# EAGLE board M-Brain (EAGLE 7.6.0)
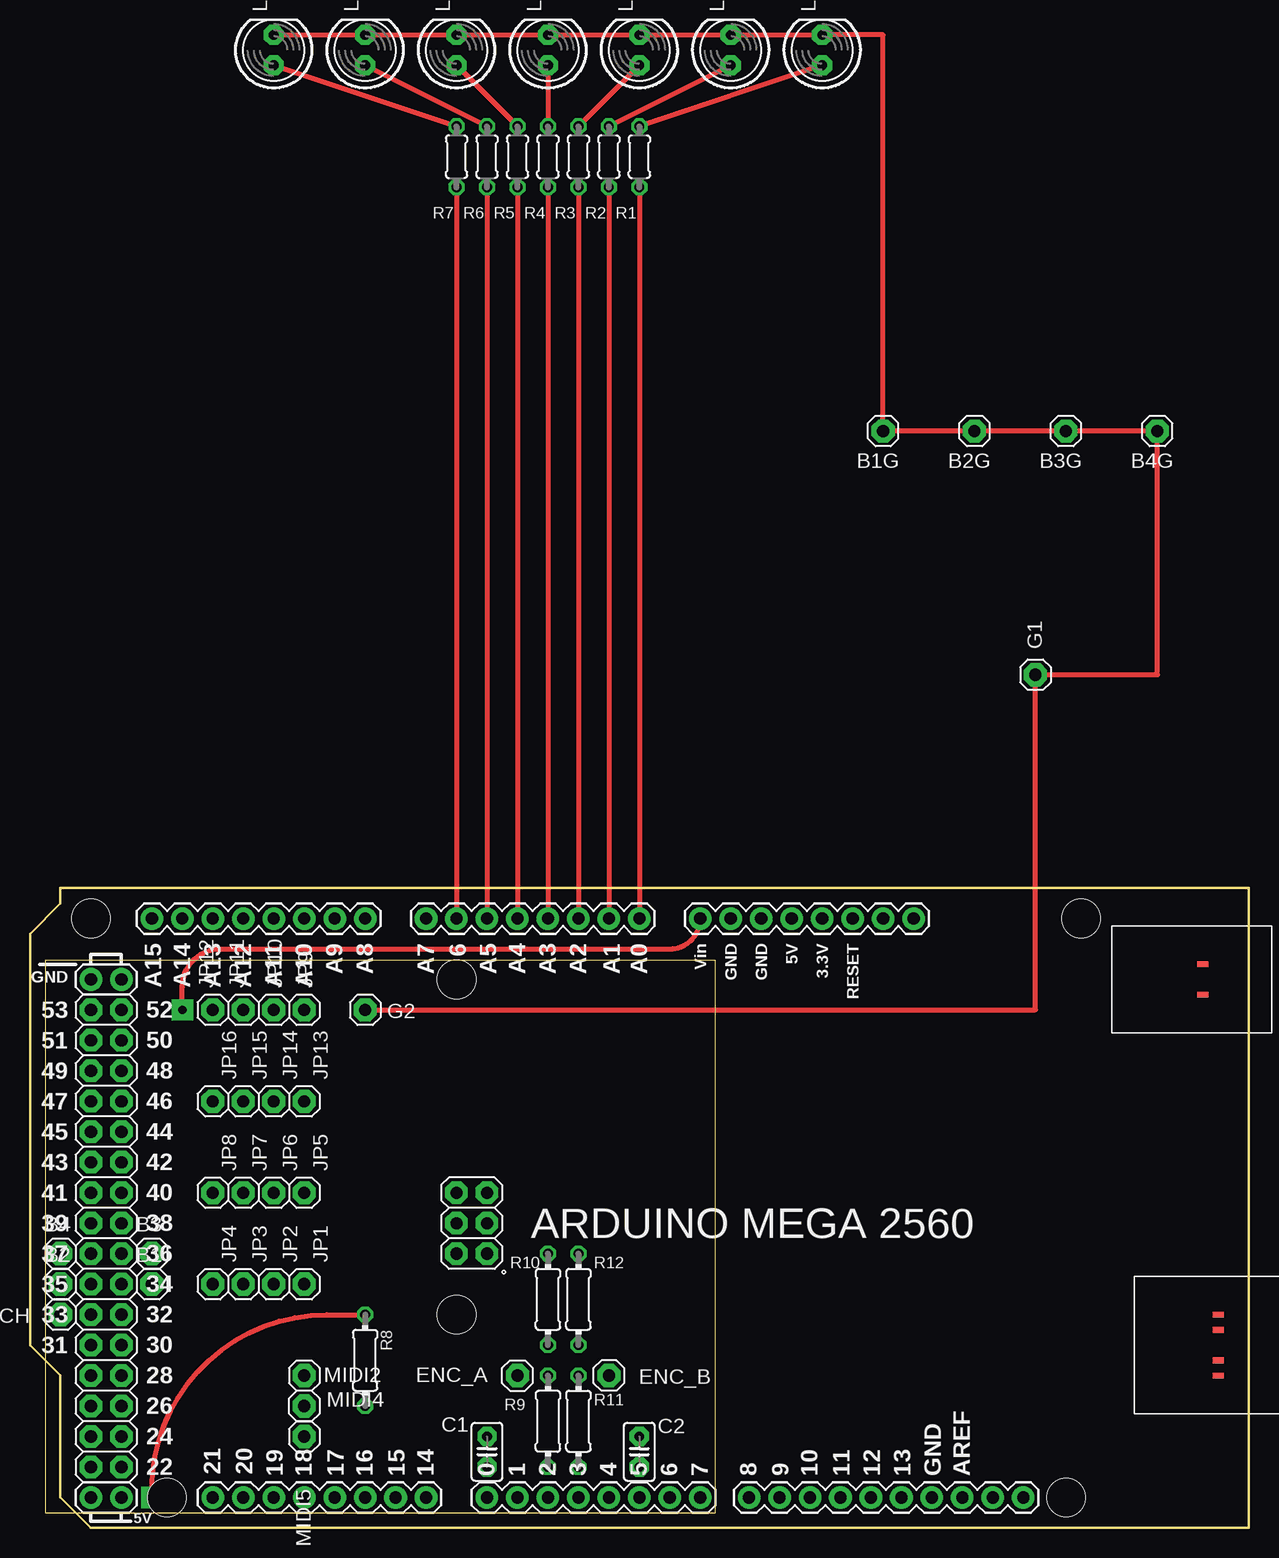
[diagram p0: board, top side]
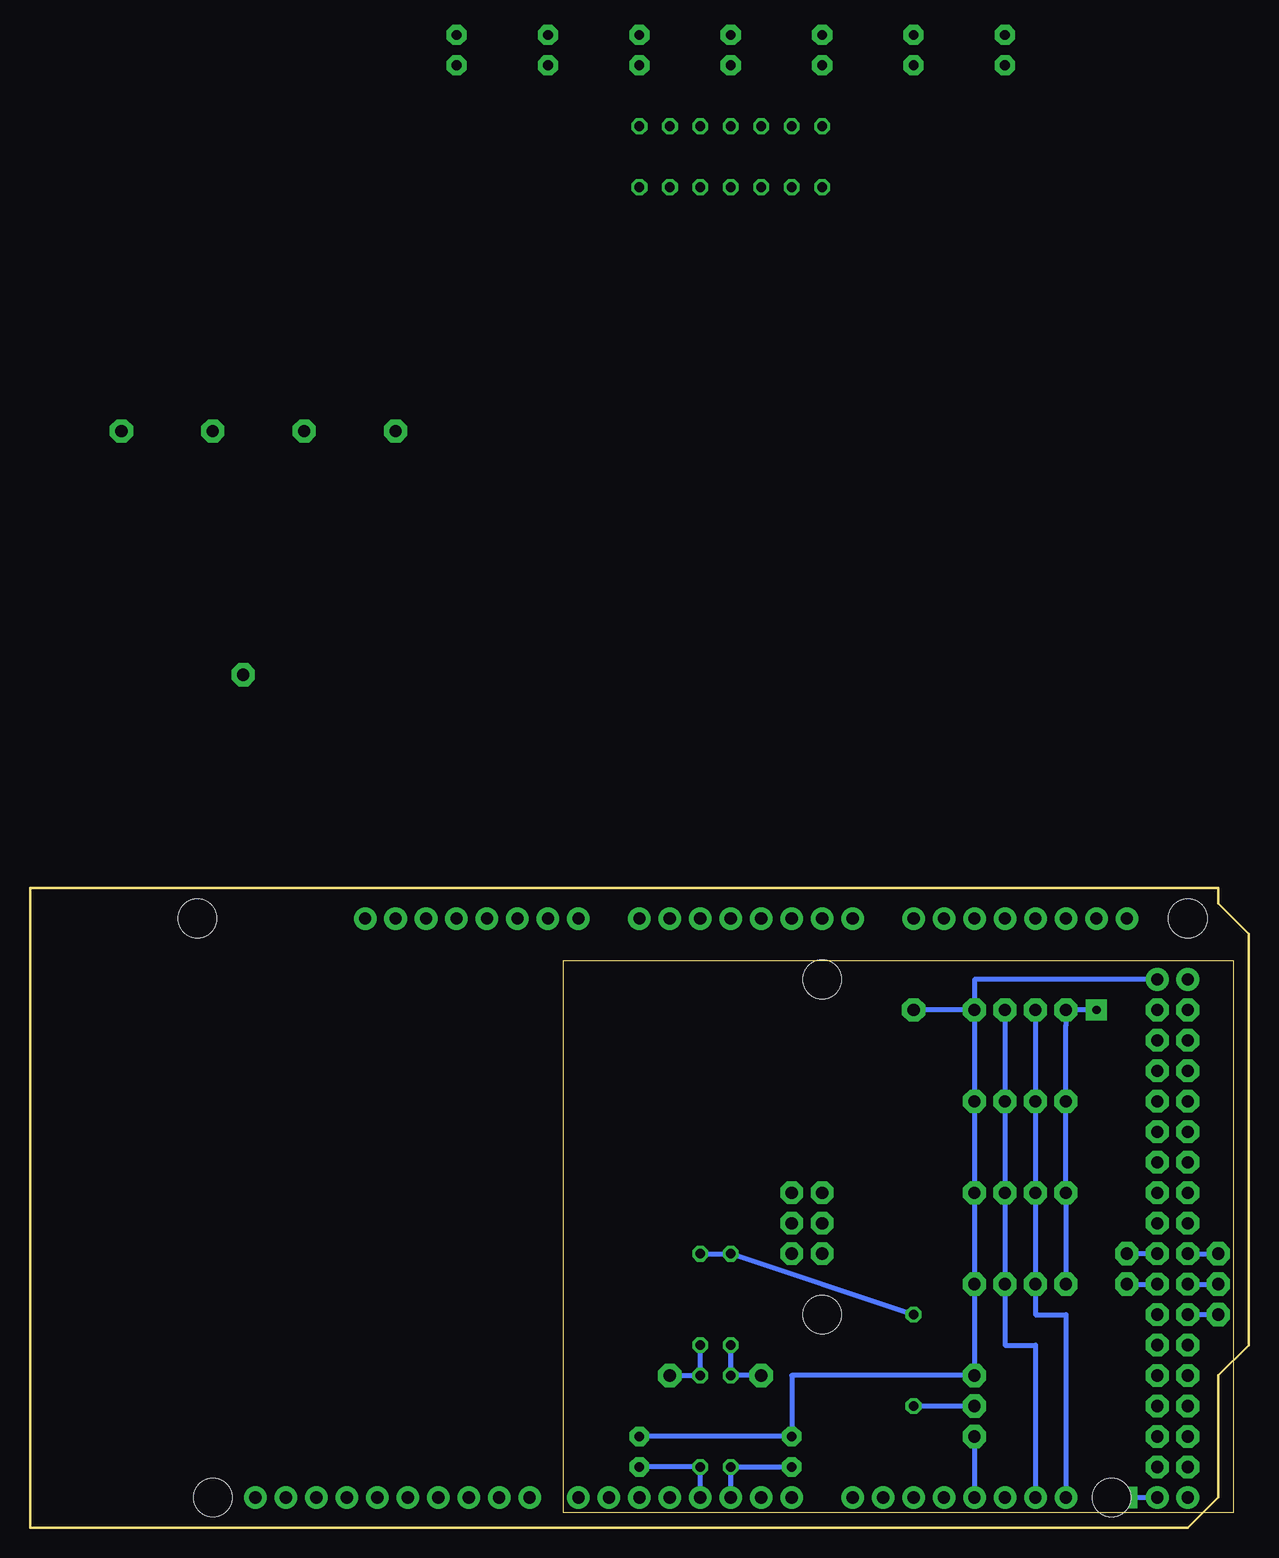
[diagram p1: board, bottom side, seen from below]

Size 101.6 x 53.34 mm. Coordinates in mm from the lower left corner, seen from the top.
Outline: 1.27,1.27 57.13,1.27 57.13,47.3 1.27,47.3 1.27,1.27
Copper layers (1*16): FlyWire 0.035mm / dielectric 1.5mm / VeroBoard 0.035mm
Design rules "default": minimum track width 10mil, minimum drill 24mil, track to track 8mil, track to pad 8mil, pad to pad 8mil, via to via 8mil, smd to smd 8mil, copper to edge 40mil, drill to drill 8mil, minimum pad ring 10mil, minimum via ring 8mil, stop-mask expansion 4mil, vias tented up to drill 0mil, thermal gap 10mil

## Footprints (pad centres in the part's own frame; a part is rotated, then mirrored left to right if it is on the bottom)
1X01 = drill 1.016 pad 1.93 octagon: 1 0,0
C2.5-2 = drill 0.813 pad 1.6 octagon: 1 -1.27,0; 2 1.27,0
LED5MM = drill 0.813 pad 1.676 octagon: A -1.27,0; K 1.27,0
ARDUINO_MEGA2560 = drill 1.016 pad 1.88: 0 63.5,50.8; 1 60.96,50.8; 2 58.42,50.8; 3 55.88,50.8; 3.3V 35.56,2.54; 4 53.34,50.8; 5 50.8,50.8; 5V 38.1,2.54; 5V. 93.98,50.8; 5V.. 96.52,50.8; 6 48.26,50.8; 7 45.72,50.8; 8 41.656,50.8; 9 39.116,50.8; 10 36.576,50.8; 11 34.036,50.8; 12 31.496,50.8; 13 28.956,50.8; 14 68.58,50.8; 15 71.12,50.8; 16 73.66,50.8; 17 76.2,50.8; 18 78.74,50.8; 19 81.28,50.8; 20 83.82,50.8; 21 86.36,50.8; A0 50.8,2.54; A1 53.34,2.54; A2 55.88,2.54; A3 58.42,2.54; A4 60.96,2.54; A5 63.5,2.54; A6 66.04,2.54; A7 68.58,2.54; A8 73.66,2.54; A9 76.2,2.54; A10 78.74,2.54; A11 81.28,2.54; A12 83.82,2.54; A13 86.36,2.54; A14 88.9,2.54; A15 91.44,2.54; AREF 23.876,50.8; GND 26.416,50.8; GND. 43.18,2.54; GND.. 40.64,2.54; GND... 93.98,7.62; GND.... 96.52,7.62; I/OREF 30.48,2.54; N/C 27.94,2.54; RESET 33.02,2.54; SCL1 18.796,50.8; SDA1 21.336,50.8; VIN 45.72,2.54 | drill 1.016 pad 1.88 octagon: 22 93.98,48.26; 23 96.52,48.26; 24 93.98,45.72; 25 96.52,45.72; 26 93.98,43.18; 27 96.52,43.18; 28 93.98,40.64; 29 96.52,40.64; 30 93.98,38.1; 31 96.52,38.1; 32 93.98,35.56; 33 96.52,35.56; 34 93.98,33.02; 35 96.52,33.02; 36 93.98,30.48; 37 96.52,30.48; 38 93.98,27.94; 39 96.52,27.94; 40 93.98,25.4; 41 96.52,25.4; 42 93.98,22.86; 43 96.52,22.86; 44 93.98,20.32; 45 96.52,20.32; 46 93.98,17.78; 47 96.52,17.78; 48 93.98,15.24; 49 96.52,15.24; 50 93.98,12.7; 51 96.52,12.7; 52 93.98,10.16; 53 96.52,10.16; +5V_ 66.04,30.48; GND__ 66.04,25.4; MISO 63.5,30.48; MOSI 66.04,27.94; RESET. 63.5,25.4; SCK 63.5,27.94 | smd 1.016 x 0.508: <PWR>+V 3.81,8.89; <PWR>-V 3.81,6.35; <USB>+V 2.54,40.64; <USB>D+ 2.54,39.37; <USB>D- 2.54,36.83; <USB>GND 2.54,35.56 | hole 3.2: 15.24,50.8; 13.97,2.54; 66.04,35.56; 66.04,7.62; 90.17,50.8; 96.52,2.54
0204/5 = drill 0.813 octagon: 1 -2.54,0; 2 2.54,0
0204/7 = drill 0.813 octagon: 1 -3.81,0; 2 3.81,0

## Placement (x,y rotation side)
B1  [1X01]  10.16,20.32 0 top
B1G  [1X01]  71.12,91.44 180 top  (outside the outline)
B2  [1X01]  2.54,20.32 0 top
B2G  [1X01]  78.74,91.44 180 top  (outside the outline)
B3  [1X01]  10.16,22.86 0 top
B3G  [1X01]  86.36,91.44 180 top  (outside the outline)
B4  [1X01]  2.54,22.86 0 top
B4G  [1X01]  93.98,91.44 180 top  (outside the outline)
C1  10nF  [C2.5-2]  38.1,6.35 90 top
C2  10nF  [C2.5-2]  50.8,6.35 90 top
ENC_A  [1X01]  40.64,12.7 90 top
ENC_B  [1X01]  48.26,12.7 270 top
G1  [1X01]  83.82,71.12 0 top  (outside the outline)
G2  [1X01]  27.94,43.18 0 top
JP1  [1X01]  22.86,20.32 0 top
JP2  [1X01]  20.32,20.32 0 top
JP3  [1X01]  17.78,20.32 0 top
JP4  [1X01]  15.24,20.32 0 top
JP5  [1X01]  22.86,27.94 0 top
JP6  [1X01]  20.32,27.94 0 top
JP7  [1X01]  17.78,27.94 0 top
JP8  [1X01]  15.24,27.94 0 top
JP9  [1X01]  22.86,43.18 0 top
JP10  [1X01]  20.32,43.18 0 top
JP11  [1X01]  17.78,43.18 0 top
JP12  [1X01]  15.24,43.18 0 top
JP13  [1X01]  22.86,35.56 0 top
JP14  [1X01]  20.32,35.56 0 top
JP15  [1X01]  17.78,35.56 0 top
JP16  [1X01]  15.24,35.56 0 top
LED1  [LED5MM]  66.04,123.19 90 top  (outside the outline)
LED2  [LED5MM]  58.42,123.19 90 top  (outside the outline)
LED3  [LED5MM]  50.8,123.19 90 top  (outside the outline)
LED4  [LED5MM]  43.18,123.19 90 top  (outside the outline)
LED5  [LED5MM]  35.56,123.19 90 top  (outside the outline)
LED6  [LED5MM]  27.94,123.19 90 top  (outside the outline)
LED7  [LED5MM]  20.32,123.19 90 top  (outside the outline)
MIDI2  [1X01]  22.86,12.7 0 top
MIDI4  [1X01]  22.86,10.16 270 top
MIDI5  [1X01]  22.86,7.62 0 top
PCB1  ARDUINO_MEGA2560  [ARDUINO_MEGA2560]  101.6,53.34 180 top
R1  1K  [0204/5]  50.8,114.3 270 top  (outside the outline)
R2  1K  [0204/5]  48.26,114.3 270 top  (outside the outline)
R3  1K  [0204/5]  45.72,114.3 270 top  (outside the outline)
R4  1K  [0204/5]  43.18,114.3 270 top  (outside the outline)
R5  1K  [0204/5]  40.64,114.3 270 top  (outside the outline)
R6  1K  [0204/5]  38.1,114.3 270 top  (outside the outline)
R7  1K  [0204/5]  35.56,114.3 270 top  (outside the outline)
R8  200R  [0204/7]  27.94,13.97 270 top
R9  10K  [0204/7]  43.18,8.89 90 top
R10  10K  [0204/7]  43.18,19.05 270 top
R11  10K  [0204/7]  45.72,8.89 270 top
R12  10K  [0204/7]  45.72,19.05 270 top
SWITCH  [1X01]  2.54,17.78 0 top

## Library data of the parts
B1 B1G B2 B2G B3 B3G B4 B4G ENC_A ENC_B G1 G2 JP1-JP16 LED1-LED7 MIDI2 MIDI4 MIDI5 SWITCH = adafruit
C1 C2 = capacitor-wima
PCB1 = E14_Arduino_revC
R1-R12 = resistor

## Nets
+5V: PCB1.5V. R8.1 R10.1 R12.1
+12V: JP4.1 JP8.1 JP12.1 JP16.1 PCB1.VIN
B1: B1.1 PCB1.34
B2: B2.1 PCB1.35
B3: B3.1 PCB1.36
B4: B4.1 PCB1.37
ENC_A: C1.1 PCB1.2 R9.1
ENC_B: C2.1 PCB1.3 R11.2
GND: B1G.1 B2G.1 B3G.1 B4G.1 C1.2 C2.2 G1.1 G2.1 JP1.1 JP5.1 JP9.1 JP13.1 LED1.K LED2.K LED3.K LED4.K LED5.K LED6.K LED7.K MIDI2.1 PCB1.GND...
LED1: PCB1.A0 R1.2
LED2: PCB1.A1 R2.2
LED3: PCB1.A2 R3.2
LED4: PCB1.A3 R4.2
LED5: PCB1.A4 R5.2
LED6: PCB1.A5 R6.2
LED7: PCB1.A6 R7.2
MIDIOUT: MIDI5.1 PCB1.18
N$1: LED1.A R1.1
N$2: LED2.A R2.1
N$3: LED3.A R3.1
N$4: LED4.A R4.1
N$5: LED5.A R5.1
N$6: LED6.A R6.1
N$7: LED7.A R7.1
N$8: MIDI4.1 R8.2
N$9: ENC_A.1 R9.2 R10.2
N$10: ENC_B.1 R11.1 R12.2
S_ENC: PCB1.33 SWITCH.1
SCL: JP3.1 JP7.1 JP11.1 JP15.1 PCB1.21
SDA: JP2.1 JP6.1 JP10.1 JP14.1 PCB1.20

## Tracks (layer width: path | path; a pad name or v marks a point on that pad's centre or on a via)
+5V  (via drill 0.7 pad 1.78)
  FlyWire 0.406: v10.16,2.54 10.16,3.18 arc-90 24.76,17.78 R8.1
  VeroBoard 0.406: v10.16,2.54 PCB1.5V. | R12.1 R10.1 R8.1
+12V  (via drill 0.7 pad 1.78)
  FlyWire 0.406: v12.7,43.18 12.7,45.09 arc-90 15.87,48.26 53.34,48.26 arc90 PCB1.VIN
  VeroBoard 0.406: JP4.1 JP8.1 JP16.1 15.24,41.91 JP12.1 v12.7,43.18
B1
  VeroBoard 0.406: B1.1 PCB1.34
B2
  VeroBoard 0.406: PCB1.35 B2.1
B3
  VeroBoard 0.406: PCB1.36 B3.1
B4
  VeroBoard 0.406: PCB1.37 B4.1
ENC_A
  VeroBoard 0.406: PCB1.2 R9.1 C1.1
ENC_B
  VeroBoard 0.406: PCB1.3 R11.2 C2.1
GND
  FlyWire 0.406: G2.1 83.82,43.18 G1.1 93.98,71.12 B4G.1 B3G.1 B2G.1 B1G.1 71.12,124.46 LED1.K LED2.K LED3.K LED4.K LED5.K LED6.K LED7.K
  VeroBoard 0.406: C2.2 C1.2 38.1,12.7 MIDI2.1 JP1.1 JP5.1 JP13.1 JP9.1 | PCB1.GND... 22.86,45.72 JP9.1 | JP9.1 G2.1
LED1
  FlyWire 0.406: R1.2 PCB1.A0
LED2
  FlyWire 0.406: R2.2 PCB1.A1
LED3
  FlyWire 0.406: R3.2 PCB1.A2
LED4
  FlyWire 0.406: R4.2 PCB1.A3
LED5
  FlyWire 0.406: R5.2 PCB1.A4
LED6
  FlyWire 0.406: R6.2 PCB1.A5
LED7
  FlyWire 0.406: R7.2 PCB1.A6
MIDIOUT
  VeroBoard 0.406: MIDI5.1 PCB1.18
N$1
  FlyWire 0.406: LED1.A R1.1
N$2
  FlyWire 0.406: LED2.A R2.1
N$3
  FlyWire 0.406: LED3.A R3.1
N$4
  FlyWire 0.406: LED4.A R4.1
N$5
  FlyWire 0.406: R5.1 LED5.A
N$6
  FlyWire 0.406: LED6.A R6.1
N$7
  FlyWire 0.406: LED7.A R7.1
N$8
  VeroBoard 0.406: R8.2 MIDI4.1
N$9
  VeroBoard 0.406: ENC_A.1 R9.2 R10.2
N$10
  VeroBoard 0.406: ENC_B.1 R11.1 R12.2
S_ENC
  VeroBoard 0.406: SWITCH.1 PCB1.33
SCL
  VeroBoard 0.406: JP11.1 JP15.1 JP7.1 JP3.1 17.78,17.78 15.24,17.78 PCB1.21
SDA
  VeroBoard 0.406: JP10.1 JP14.1 JP6.1 JP2.1 20.32,15.24 17.78,15.24 PCB1.20